# Altium PCB ROV_PCB4.PcbDoc
Units mm, origin at the board's own origin, x right, y up, seen from the top; angles counter-clockwise.
Board outline 76.45 x 67.69 mm, 2 copper layers (Top Layer, Bottom Layer); 24 components, 32 nets, 126 pads, 15 vias.
Unrouted connection lines stored in the file: 9.
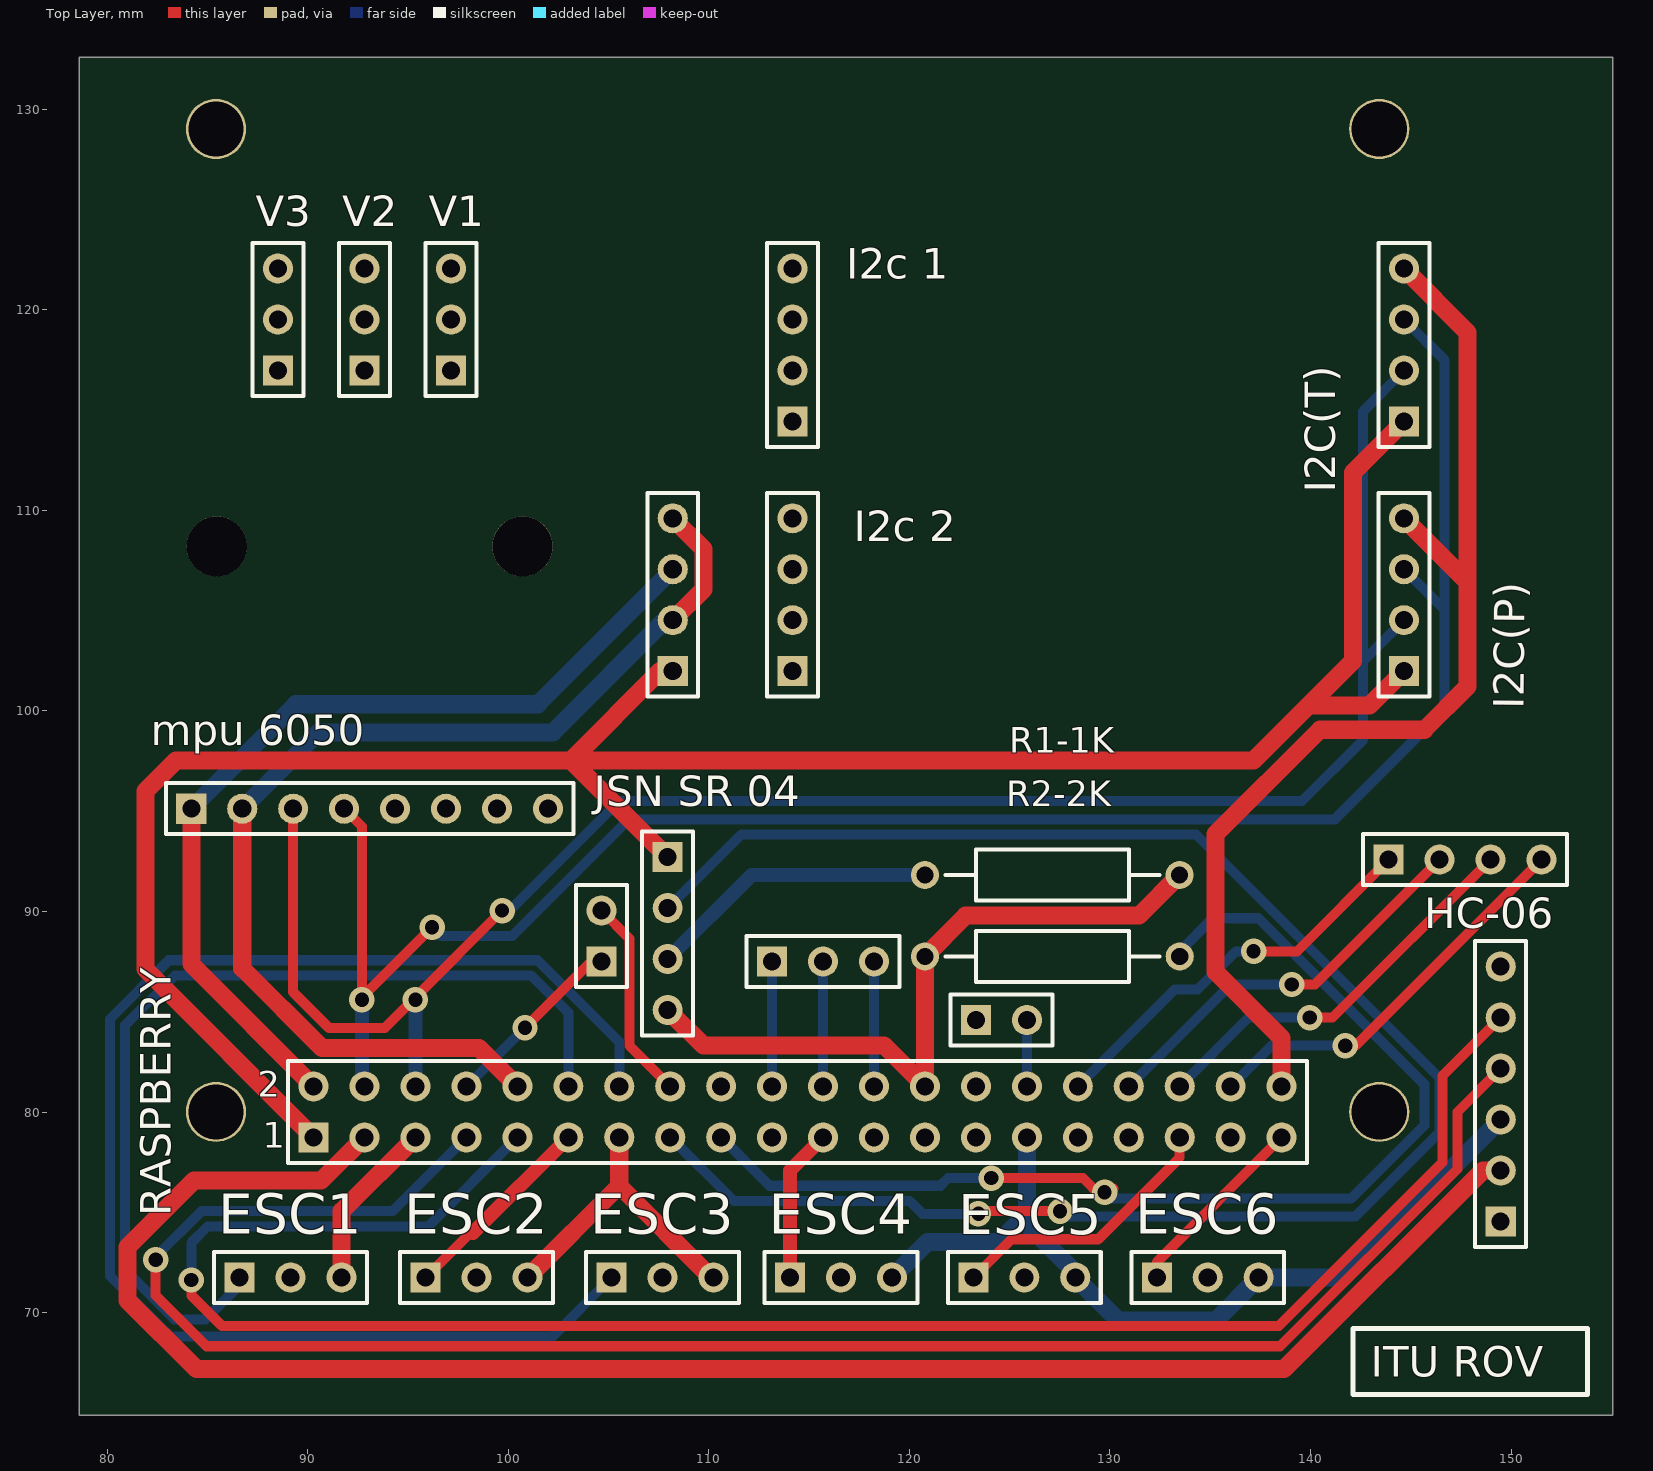
[diagram p0: Top Layer view]
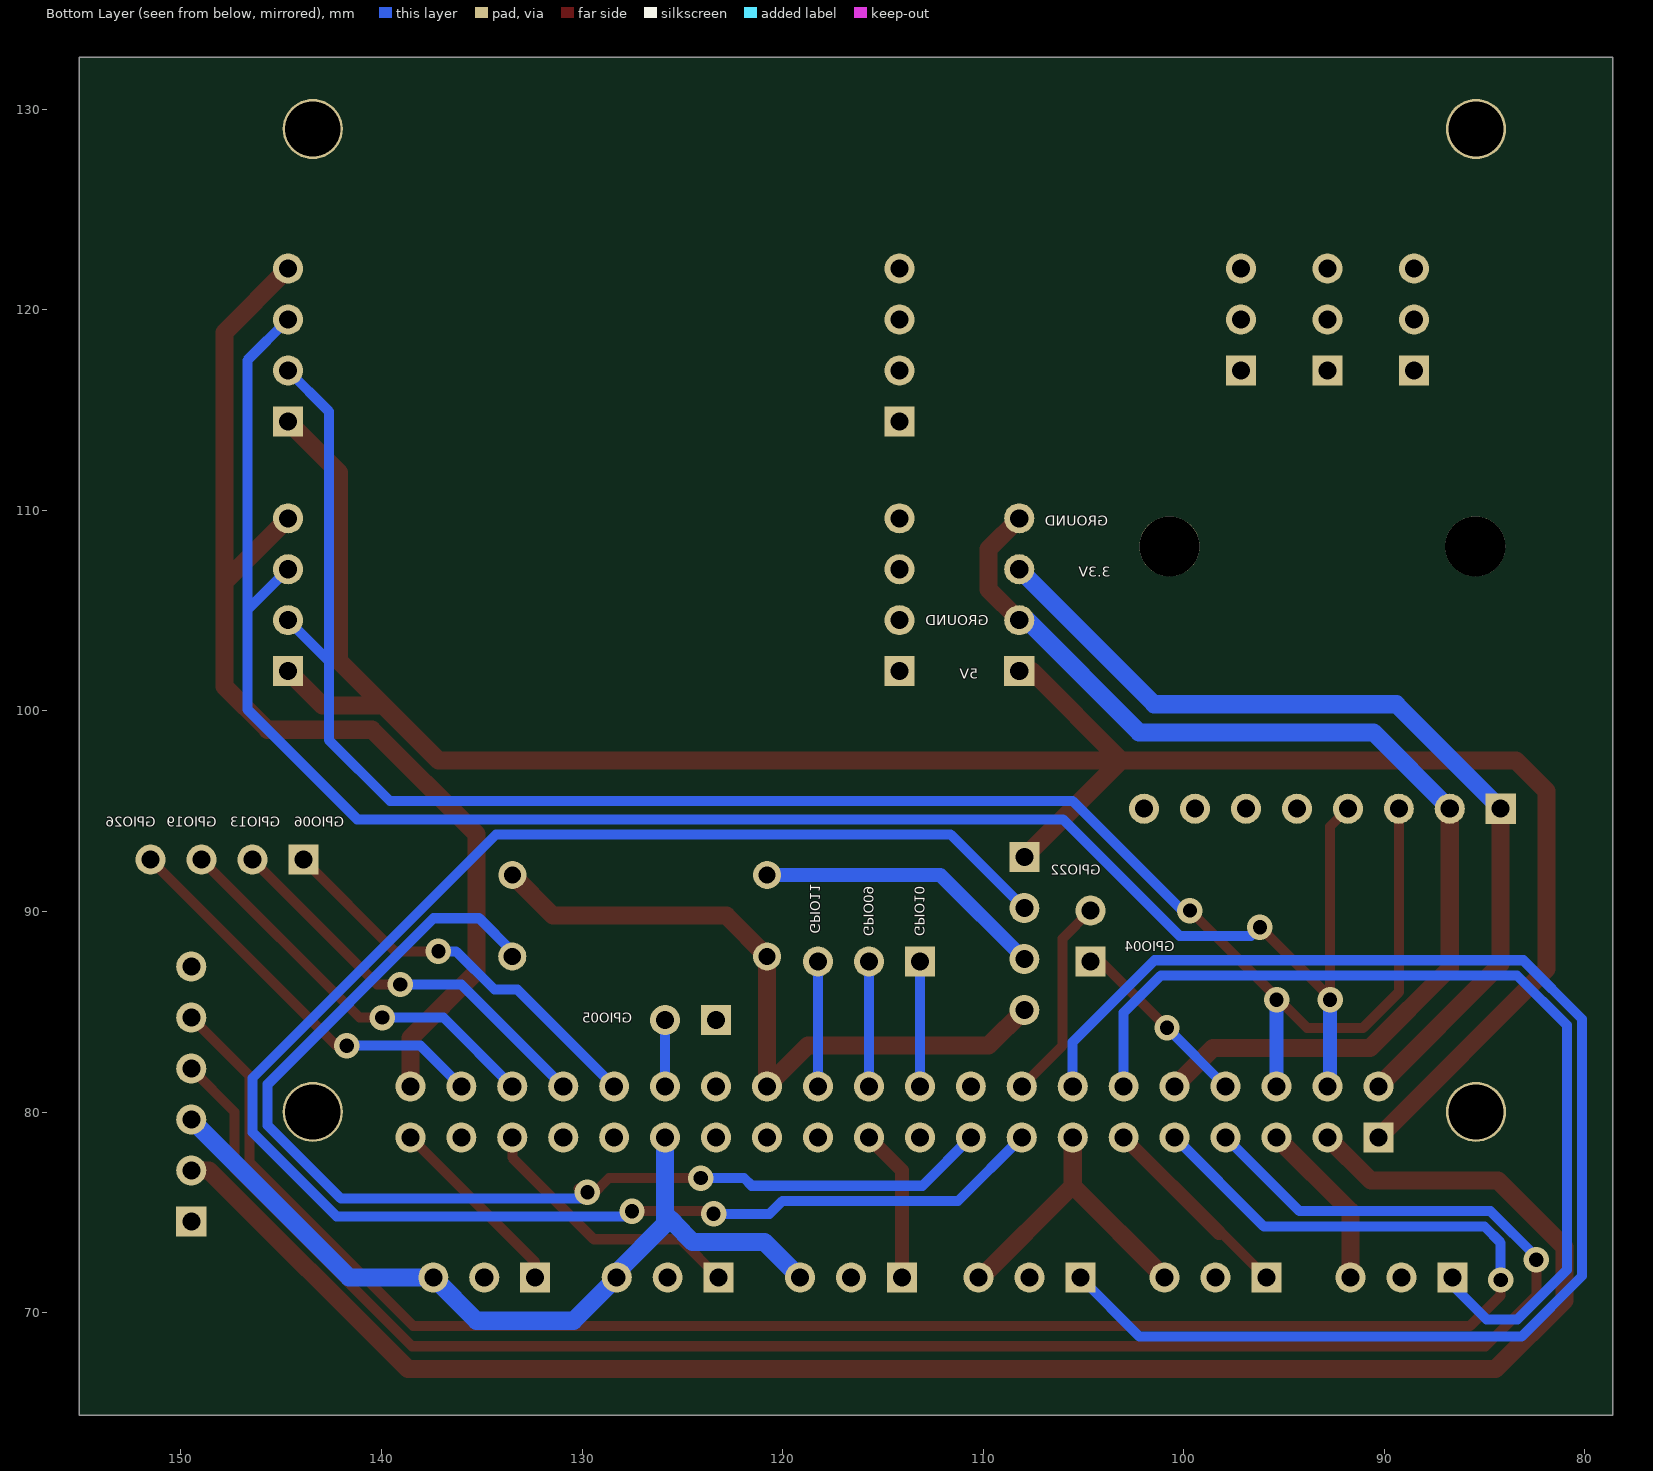
[diagram p1: Bottom Layer view, seen from below]

## Layer stack, top to bottom
Top Solder: solder mask 0.0102, Solder Resist, Dk 3.5
Top Layer: signal copper 0.0356
Dielectric 1: dielectric 0.32, FR-4, Dk 4.8
Bottom Layer: signal copper 0.0356
Bottom Solder: solder mask 0.0102, Solder Resist, Dk 3.5

## Board outline
78.613,64.897 78.613,132.588 155.067,132.588 155.067,64.897

## Design rules (kind name [scope] priority, off if disabled: settings)
Clearance [All] p1: gap=0.254
PolygonConnect [All] p1: connectstyle=Relief reliefconductorwidth=0.254 reliefentries=4 polygonreliefangle="90 Angle" airgapwidth=0.254
RoutingVias [All] p1: holewidth=0.711 width=1.27 viastyle="Through Hole" minholewidth=0.711 minwidth=1.27 maxholewidth=0.711 maxwidth=1.27
SolderMaskExpansion [All] p1: expansion=0.102
Width [All] p1 off: maxlimit=0.254 minlimit=0.254 preferedwidth=0.254
30 further rules are at their usual default settings.

## Components (designator, comment, footprint, x,y, rotation, side; value= is the part's Value field where it differs from the comment)
ESC1 "Header 3" HDR1X3 86.614,71.755 r0 top (schematic designator esc1)
ESC2 "Header 3" HDR1X3 95.885,71.755 r0 top (schematic designator esc2)
ESC3 "Header 3" HDR1X3 105.156,71.755 r0 top (schematic designator esc3)
ESC4 "Header 3" HDR1X3 114.046,71.755 r0 top (schematic designator esc4)
ESC5 "Header 3" HDR1X3 123.19,71.755 r0 top (schematic designator esc5)
ESC6 "Header 3" HDR1X3 132.334,71.755 r0 top (schematic designator esc6)
Extra2 "Header 4" HDR1X4 108.204,101.981 r90 top
"EXTRA 0" "Header 4" HDR1X4 143.891,92.583 r0 top
"EXTRA 2" "Header 2" HDR1X2 104.648,87.503 r90 top
"EXTRA 3" "Header 3" HDR1X3 113.157,87.503 r0 top
"EXTRA 5" "Header 2" HDR1X2 123.317,84.582 r0 top
HC-06 "Header 6" HDR1X6 149.479,74.549 r90 top
"I2c 1" "Header 4" HDR1X4 114.173,114.427 r90 top
"I2c 2" "Header 4" HDR1X4 114.173,101.981 r90 top
I2C(P) "Header 4" HDR1X4 144.653,101.981 r90 top
I2C(T) "Header 4" HDR1X4 144.653,114.427 r90 top
"JSN SR 04" "" HDR1X4 107.95,92.71 r270 top
"mpu 6050" "DIREK RASP" HDR1X8 84.201,95.123 r0 top
R1-1K "1k" AXIAL-0.5#1 127.127,91.821 r180 top
R2-2K "Res Semi" AXIAL-0.5#2 127.127,87.757 r180 top
RASPBERRY "Header 20X2" HDR2X20 90.297,78.74 r0 top
V1 "Header 3" HDR1X3 97.155,116.967 r90 top
V2 "Header 3" HDR1X3 92.837,116.967 r90 top
V3 "Header 3" HDR1X3 88.519,116.967 r90 top

## Footprints (in the part's own frame and the unit in brackets; to place one, negate y for a bottom-side part, rotate by r counter-clockwise, add the part's x,y. Pads: shape width x height; smd on the part's side, far side on the other; paste and mask are expansions set on the pad)
AXIAL-0.5#1 [mm] "Axial Device, Thru-Hole; 2 Leads; 0.5 in Pin Spacing"
  round 1.4 hole 0.85: 1(-6.347,0) 2(6.357,0)
  silkscreen extent -5.33,-1.27 5.33,1.27
AXIAL-0.5#2 [mm] "Axial Device, Thru-Hole; 2 Leads; 0.5 in Pin Spacing"
  round 1.4 hole 0.85: 1(-6.35,0) 2(6.357,0)
  silkscreen extent -5.33,-1.27 5.33,1.27
HDR1X2 [mm] "Connector; Header; 2 Position"
  rect 1.5x1.5 hole 0.9: 1(0,0)
  round 1.5 hole 0.9: 2(2.54,0)
  silkscreen extent -1.27,-1.27 3.81,1.27
HDR1X3 [mm] "Connector; Header; 3 Position"
  rect 1.5x1.5 hole 0.9: 1(0,0)
  round 1.5 hole 0.9: 2(2.54,0) 3(5.08,0)
  silkscreen extent -1.27,-1.27 6.35,1.27
HDR1X4 [mm] "Connector; Header; 4 Position"
  rect 1.5x1.5 hole 0.9: 1(0,0)
  round 1.5 hole 0.9: 2(2.54,0) 3(5.08,0) 4(7.62,0)
  silkscreen extent -1.27,-1.27 8.89,1.27
HDR1X6 [mm] "Connector; Header; 6 Position"
  rect 1.5x1.5 hole 0.9: 1(0,0)
  round 1.5 hole 0.9: 2(2.54,0) 3(5.08,0) 4(7.62,0) 5(10.16,0) 6(12.7,0)
  silkscreen extent -1.27,-1.27 13.97,1.27
HDR1X8 [mm] "Connector; Header; 8 Position"
  rect 1.5x1.5 hole 0.9: 1(0,0)
  round 1.5 hole 0.9: 2(2.54,0) 3(5.08,0) 4(7.62,0) 5(10.16,0) 6(12.7,0) 7(15.24,0) 8(17.78,0)
  silkscreen extent -1.27,-1.27 19.05,1.27
HDR2X20 [mm] "Connector; Header; 20x2 Position"
  rect 1.5x1.5 hole 0.9: 1(0,0)
  round 1.5 hole 0.9: 2(0,2.54) 3(2.54,0) 4(2.54,2.54) 5(5.08,0) 6(5.08,2.54) 7(7.62,0) 8(7.62,2.54) 9(10.16,0) 10(10.16,2.54) 11(12.7,0) 12(12.7,2.54) 13(15.24,0) 14(15.24,2.54) 15(17.78,0) 16(17.78,2.54) 17(20.32,0) 18(20.32,2.54) 19(22.86,0) 20(22.86,2.54) 21(25.4,0) 22(25.4,2.54) 23(27.94,0) 24(27.94,2.54) 25(30.48,0) 26(30.48,2.54) 27(33.02,0) 28(33.02,2.54) 29(35.56,0) 30(35.56,2.54) 31(38.1,0) 32(38.1,2.54) 33(40.64,0) 34(40.64,2.54) 35(43.18,0) 36(43.18,2.54) 37(45.72,0) 38(45.72,2.54) 39(48.26,0) 40(48.26,2.54)
  silkscreen extent -1.27,-1.27 49.53,3.81

## Part data
ESC1 ESC2 ESC3 ESC4 ESC5 ESC6 "EXTRA 3" V1 V2 V3: "Header, 3-Pin"
Extra2 "EXTRA 0" "I2c 1" "I2c 2" I2C(P) I2C(T): "Header, 4-Pin"
"EXTRA 2" "EXTRA 5": "Header, 2-Pin"
HC-06: "Header, 6-Pin"
"JSN SR 04": library part "Header 4", "Header, 4-Pin"
"mpu 6050": library part "Header 8", "Header, 8-Pin"
R1-1K: library part "Res Semi", "Semiconductor Resistor"
R2-2K: "Semiconductor Resistor"
RASPBERRY: "Header, 20-Pin, Dual row"

## Free pads (board coordinates)
  round 3 hole 2.75: 1(85.435,129.01) 3(143.425,129.01) 4(85.435,80.01) 5(143.425,80.01)
  round 3 hole 3: 2(85.471,108.2) 7(100.711,108.2)

## Via types
v1: diameter 1.27, hole 0.711, Top Layer to Bottom Layer, 15 vias

## Nets (pads, with @x,y where several pads share a name; then routed paths per layer and width w, separated by ;. In a path a pad name is that pad's centre, name@x,y a point inside that pad or via, vN(x,y) a via of type N, cw(c..) or ccw(c..) an arc to the next point about the centre after c; other vN are vias at no path point)
3.3V: "mpu 6050.1" Extra2.3 RASPBERRY.2 RASPBERRY.18 | length 45.3
  Top Layer w0.9: 84.201,95.123 84.201,87.376 RASPBERRY.2
  Bottom Layer w0.9: 84.201,95.123 89.408,100.33 101.473,100.33 Extra2.3
5V: "JSN SR 04.1" Extra2.1 HC-06.2 I2C(P).1 I2C(T).1 RASPBERRY.1 RASPBERRY.3 | length 206.6
  Top Layer w0.9: RASPBERRY.1 81.915,87.122 81.915,96.012 83.439,97.536 103.124,97.536 ; RASPBERRY.3 90.678,76.581 84.328,76.581 81.026,73.279 81.026,70.612 84.455,67.183 138.684,67.183 148.59,77.089 HC-06.2 ; 107.95,92.71 103.124,97.536 ; Extra2.1 107.569,101.981 103.124,97.536 ; 144.653,101.981 142.939,100.266 139.891,100.266 ; 144.653,114.427 142.113,111.887 142.113,102.489 139.891,100.266 ; 103.124,97.536 137.16,97.536 139.891,100.266
GPIO02: "mpu 6050.4" I2C(P).3 I2C(T).3 RASPBERRY.4 | length 97.7
  Top Layer w0.5: 91.821,95.123 92.71,94.234 v1@92.71,85.725 ; v1(92.71,85.598) v1@92.71,85.725 ; v1(96.203,89.218) v1@92.71,85.725
  Bottom Layer w0.5: RASPBERRY.4@92.71,81.407 RASPBERRY.4 ; v1(96.203,89.218) 96.647,88.773 100.203,88.773 106.026,94.596 141.205,94.596 146.685,100.076 146.685,105.029 ; 144.653,107.061 146.685,105.029 ; 144.653,119.507 146.685,117.475 146.685,105.029
  Bottom Layer w0.7: RASPBERRY.4@92.71,81.407 v1(92.71,85.598)
GPIO03: "mpu 6050.3" I2C(P).2 I2C(T).2 RASPBERRY.6 | length 95.7
  Top Layer w0.5: 89.281,95.123 89.281,85.979 91.059,84.201 93.853,84.201 v1@95.377,85.725 ; v1(95.377,85.598) v1@95.377,85.725 ; v1(99.695,90.043) v1@95.377,85.725
  Bottom Layer w0.5: v1(99.695,90.043) 100.076,90.043 105.537,95.504 139.573,95.504 142.621,98.552 142.621,102.489 ; 144.653,104.521 142.621,102.489 ; 144.653,116.967 142.621,114.935 142.621,102.489
  Bottom Layer w0.7: RASPBERRY.6 v1(95.377,85.598)
GPIO04: "EXTRA 2.1" RASPBERRY.8 | length 9.3
  Top Layer w0.5: v1(100.838,84.201) 104.14,87.503 104.648,87.503
  Bottom Layer w0.5: RASPBERRY.8 v1(100.838,84.201)
GPIO05: "EXTRA 5.2" RASPBERRY.30 | length 3.3
  Bottom Layer w0.5: RASPBERRY.30 125.857,84.582
GPIO06: "EXTRA 0.1" RASPBERRY.32 | length 20.2
  Top Layer w0.5: v1(137.16,88.011) 139.319,88.011 143.891,92.583
  Bottom Layer w0.5: RASPBERRY.32 133.223,86.106 134.366,86.106 136.271,88.011 v1(137.16,88.011)
GPIO07: RASPBERRY.25
GPIO08: RASPBERRY.23
GPIO09: "EXTRA 3.2" RASPBERRY.22 | length 6
  Bottom Layer w0.5: RASPBERRY.22 115.697,87.249
GPIO10: "EXTRA 3.1" RASPBERRY.20 | length 6
  Bottom Layer w0.5: RASPBERRY.20 113.157,87.249
GPIO11: "EXTRA 3.3" RASPBERRY.24 | length 6
  Bottom Layer w0.5: RASPBERRY.24 118.237,87.249
GPIO12: RASPBERRY.31
GPIO13: "EXTRA 0.2" RASPBERRY.34 | length 20.2
  Top Layer w0.5: v1(139.065,86.36) 140.208,86.36 146.431,92.583
  Bottom Layer w0.5: RASPBERRY.34 136.017,86.36 v1(139.065,86.36)
GPIO14: HC-06.4 RASPBERRY.7 | length 95.4
  Top Layer w0.5: v1(82.423,72.644) 82.423,70.866 84.963,68.326 138.478,68.326 147.32,77.168 147.32,80.01 HC-06.4
  Bottom Layer w0.5: v1(82.423,72.644) 82.423,72.771 84.709,75.057 94.234,75.057 RASPBERRY.7
GPIO15: HC-06.5 RASPBERRY.9 | length 95.9
  Top Layer w0.5: v1(84.201,71.628) 84.201,70.866 85.725,69.342 138.428,69.342 146.566,77.48 146.566,81.796 HC-06.5
  Bottom Layer w0.5: v1(84.201,71.628) 84.201,73.483 85.013,74.295 96.012,74.295 RASPBERRY.9
GPIO16: ESC5.1 RASPBERRY.35 | length 13.8
  Top Layer w0.5: ESC5.1 125.095,73.66 129.413,73.66 133.477,77.724 RASPBERRY.35
GPIO17: ESC1.1 RASPBERRY.12 | length 47.6
  Bottom Layer w0.5: ESC1.1 86.614,71.374 84.901,69.661 83.374,69.661 80.899,72.136 80.899,84.328 83.385,86.814 101.146,86.814 102.997,84.963 RASPBERRY.12
GPIO18: ESC2.1 RASPBERRY.11 | length 10
  Top Layer w0.5: ESC2.1 98.108,73.977 98.234,73.977
  Top Layer w0.7: 98.234,73.977 RASPBERRY.11
GPIO19: "EXTRA 0.3" RASPBERRY.36 | length 20.2
  Top Layer w0.5: v1(139.954,84.709) 141.097,84.709 148.971,92.583
  Bottom Layer w0.5: RASPBERRY.36 136.906,84.709 v1(139.954,84.709)
GPIO20: RASPBERRY.37
GPIO21: ESC6.1 RASPBERRY.39 | length 9.6
  Top Layer w0.5: ESC6.1 132.334,72.517 RASPBERRY.39
GPIO22: "EXTRA 2.2" RASPBERRY.16 | length 10.2
  Top Layer w0.5: 104.648,90.043 106.045,88.646 106.045,83.312 RASPBERRY.16
GPIO23: "JSN SR 04.2" RASPBERRY.15 | length 90.1
  Top Layer w0.5: v1(123.444,74.93) 123.571,75.057 v1(127.508,75.057) ; v1@127.381,74.93 v1@127.762,74.93
  Bottom Layer w0.5: 107.95,90.17 111.622,93.842 134.286,93.842 146.431,81.697 146.431,78.994 142.24,74.803 127.508,74.803 v1(127.508,75.057) ; RASPBERRY.15 111.252,75.565 120.015,75.565 120.65,74.93 v1(123.444,74.93)
GPIO24: R2-2K.1 RASPBERRY.17 | length 57.2
  Top Layer w0.5: v1(124.079,76.708) 128.651,76.708 129.54,75.819 v1(129.731,76.01) 129.921,76.2 v1@130.175,76.2
  Bottom Layer w0.5: RASPBERRY.17 113.03,76.327 121.539,76.327 121.92,76.708 v1(124.079,76.708) ; v1(129.731,76.01) 130.048,75.692 142.026,75.692 145.669,79.335 145.669,81.393 137.4,89.662 135.128,89.662 R2-2K.1@133.477,88.011
GPIO25: ESC4.1 RASPBERRY.21 | length 7.7
  Top Layer w0.7: ESC4.1 114.046,77.089 RASPBERRY.21
GPIO26: "EXTRA 0.4" RASPBERRY.38 | length 20.2
  Top Layer w0.5: v1(141.732,83.312) 142.24,83.312 151.511,92.583
  Bottom Layer w0.5: RASPBERRY.38 138.049,83.312 v1(141.732,83.312)
GPIO27: ESC3.1 RASPBERRY.14 | length 70.8
  Bottom Layer w0.5: ESC3.1 102.204,68.803 83.166,68.803 80.145,71.824 80.145,84.64 83.073,87.568 101.458,87.568 105.537,83.489 RASPBERRY.14
GROUND: "JSN SR 04.4" "mpu 6050.2" ESC1.3 ESC2.3 ESC3.3 ESC4.3 ESC5.3 ESC6.3 Extra2.2 Extra2.4 HC-06.3 I2C(P).4 I2C(T).4 R1-1K.1 R2-2K.2 RASPBERRY.5 RASPBERRY.10 RASPBERRY.13 RASPBERRY.19 RASPBERRY.26 RASPBERRY.29 RASPBERRY.33 RASPBERRY.40 | length 213.6
  Top Layer w0.9: 86.741,95.123 86.741,87.17 90.726,83.185 98.552,83.185 RASPBERRY.10 ; ESC1.3 91.694,75.057 RASPBERRY.5 ; ESC2.3 105.537,76.327 ; RASPBERRY.13 105.537,76.327 ; 107.95,85.09 109.728,83.312 118.745,83.312 RASPBERRY.26@120.77,81.287 ; Extra2.2 109.728,106.045 109.728,108.077 Extra2.4 ; ESC3.3 110.109,71.755 105.537,76.327 ; RASPBERRY.26 RASPBERRY.26@120.77,81.287 ; R1-1K.1 131.442,89.789 122.802,89.789 R2-2K.2 RASPBERRY.26@120.77,81.287 ; RASPBERRY.40 138.557,83.693 135.255,86.995 135.255,93.853 140.462,99.06 145.669,99.06 147.828,101.219 147.828,106.426 ; 144.653,109.601 147.828,106.426 ; 144.653,122.047 147.828,118.872 147.828,106.426
  Bottom Layer w0.9: 86.741,95.123 90.551,98.933 102.235,98.933 107.823,104.521 Extra2.2 ; ESC4.3 120.904,73.533 124.49,73.533 125.395,74.438 125.395,74.468 125.857,74.93 ; RASPBERRY.29 125.857,74.93 ; HC-06.3 141.605,71.755 ESC6.3 135.255,69.596 130.429,69.596 ESC5.3 128.27,72.009 125.857,74.422 125.857,74.93
ID_SC: RASPBERRY.27
ID_SD: RASPBERRY.28
"NetJSN SR 04_3": "JSN SR 04.3" R1-1K.2 | length 14.6
  Bottom Layer w0.7: 107.95,87.63 112.141,91.821 R1-1K.2
pads on no net: "EXTRA 5.1" "I2c 1.1" "I2c 1.2" "I2c 1.3" "I2c 1.4" "I2c 2.1" "I2c 2.2" "I2c 2.3" "I2c 2.4" "mpu 6050.5" "mpu 6050.6" "mpu 6050.7" "mpu 6050.8" ESC1.2 ESC2.2 ESC3.2 ESC4.2 ESC5.2 ESC6.2 HC-06.1 HC-06.6 V1.1 V1.2 V1.3 V2.1 V2.2 V2.3 V3.1 V3.2 V3.3

## Silkscreen, mask and mechanical layers (free items; w line width, h text height)
Top Overlay:
  lines w0.254: 142.113,65.913 153.797,65.913 153.797,69.215 142.113,69.215 142.113,65.913
  text "ITU ROV" at 143.002,66.802 h1.52
Bottom Overlay:
  text "GROUND" at 103.759,109.22 h0.51
  text "3.3V" at 103.632,106.68 h0.51
  text "GROUND" at 109.728,104.267 h0.51
  text "5V" at 110.236,101.6 h0.51
  text "GPIO06" at 141.859,94.234 h0.5
  text "GPIO13" at 145.034,94.234 h0.5
  text "GPIO19" at 148.209,94.234 h0.5
  text "GPIO26" at 151.257,94.234 h0.5
  text "GPIO22" at 104.14,91.821 h0.5
  text "GPIO11" at 118.618,88.9 h0.5 r90
  text "GPIO10" at 113.411,88.773 h0.5 r90
  text "GPIO09" at 115.951,88.773 h0.5 r90
  text "GPIO04" at 100.457,88.011 h0.5
  text "GPIO05" at 127.508,84.455 h0.5
Mechanical 1:
  the board outline again, w1.27

## Text inside footprints (layer, text, board x,y; h text height)
RASPBERRY: Top Overlay "1" at 87.757,78.232 h1.27; Top Overlay "2" at 87.503,80.772 h1.27